# Altium PCB punto5pcb.PcbDoc
Units mm, origin at the board's own origin, x right, y up, seen from the top; angles counter-clockwise.
Board outline 50 x 50 mm, 2 copper layers (Top Layer, Bottom Layer); 23 components, 13 nets, 47 pads, 0 vias.
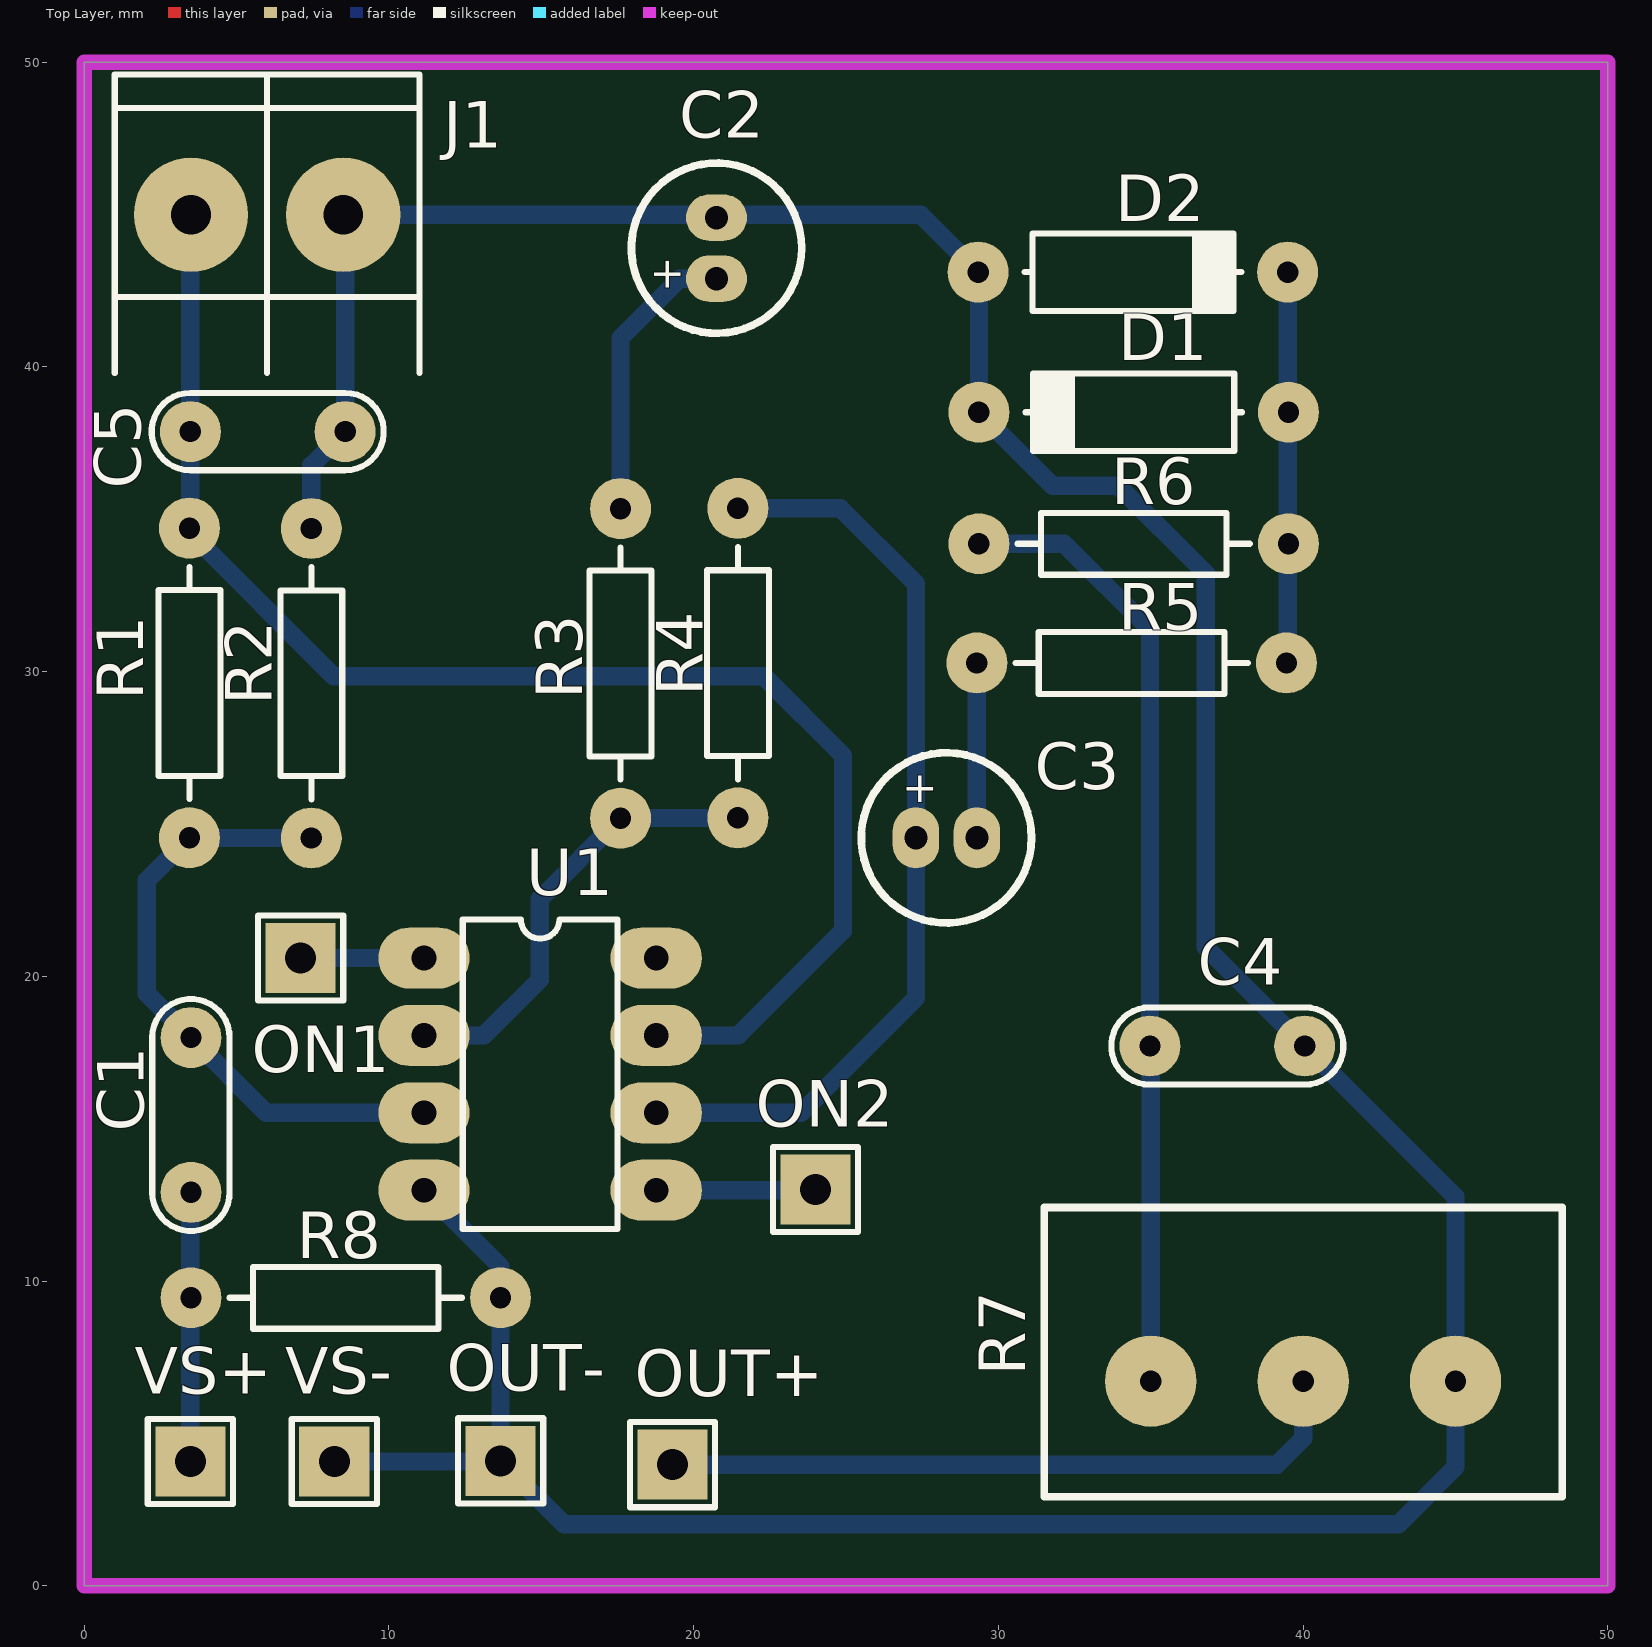
[diagram p0: Top Layer view]
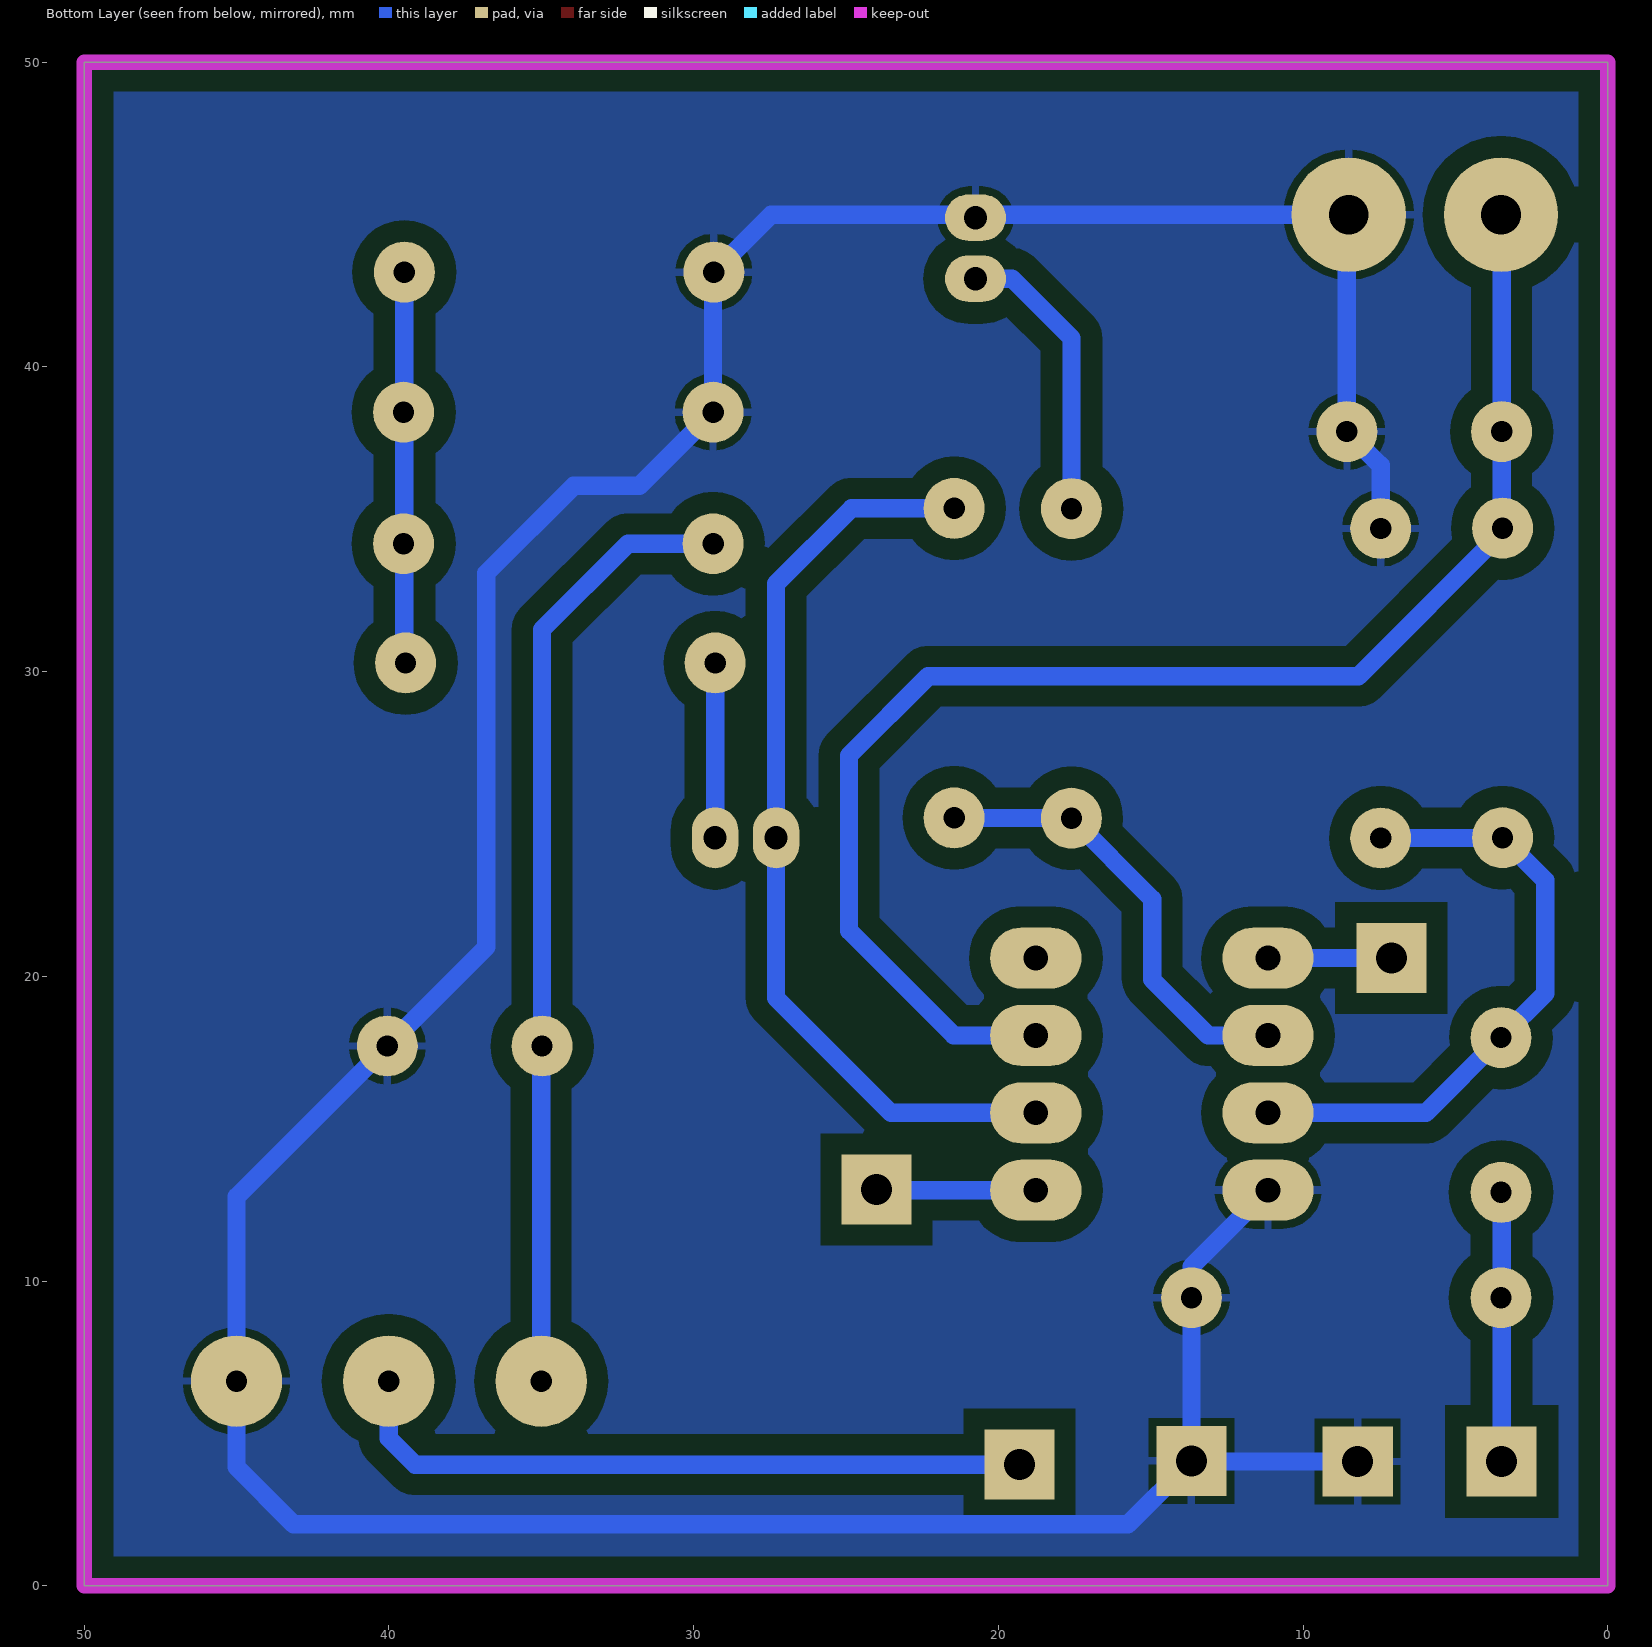
[diagram p1: Bottom Layer view, seen from below]
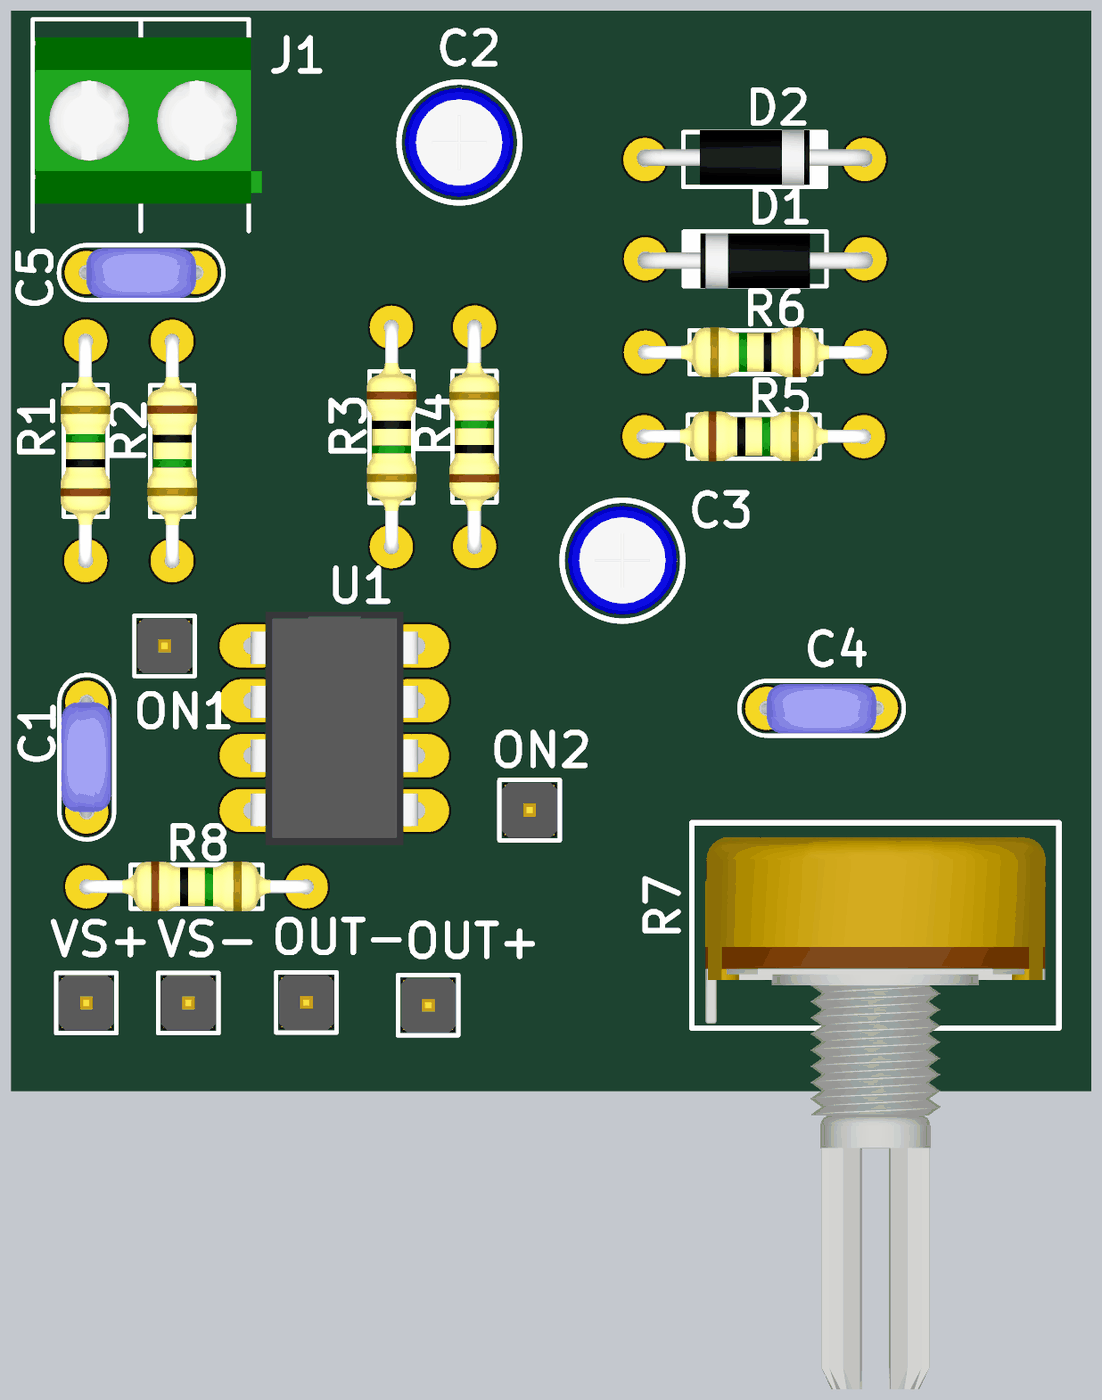
[diagram p2: 3D render of the assembled board from above, using the file's embedded part models]

## Layer stack, top to bottom
Top Solder: solder mask 0.0102, Solder Resist, Dk 3.5
Top Layer: signal copper 0.0356
Dielectric 1: dielectric 0.32, FR-4, Dk 4.8
Bottom Layer: signal copper 0.0356
Bottom Solder: solder mask 0.0102, Solder Resist, Dk 3.5

## Board outline
0,0 0,50 50,50 50,0 0,0

## Design rules (kind name [scope] priority, off if disabled: settings)
Clearance Polygon_Clearance [InPolygon] p1: gap=0.7
Clearance [All] p2: gap=0.3
PolygonConnect [All] p1: connectstyle=Relief reliefconductorwidth=0.254 reliefentries=4 polygonreliefangle="90 Angle" airgapwidth=0.254
RoutingVias [All] p1: holewidth=0.5 width=2 viastyle="Through Hole" minholewidth=0.5 minwidth=2 maxholewidth=0.5 maxwidth=2
SolderMaskExpansion [All] p1: expansion=0.102
Width [All] p1: maxlimit=0.6 minlimit=0.6 preferedwidth=0.6
30 further rules are at their usual default settings.

## Classes and differential pairs
component class punto5sq: C3 C4 C5 D1 D2 J1 ON1 ON2 OUT+ OUT- R1 R2 R3 R4 R5 R6 R8 VS+ VS-

## Components (designator, comment, footprint, x,y, rotation, side; value= is the part's Value field where it differs from the comment)
C1 "CAP" CAP200 3.5,15.45 r270 top
C2 "CAPPOL" CAP100RP 20.75,43.9 r90 top
C3 "33u" CAP100RP 28.296,24.546 r0 top
C4 "CAP" CAP200 37.516,17.713 r0 top
C5 "CAP" CAP200 6.02,37.881 r0 top
D1 "DIODO" DO41 34.442,38.516 r180 top
D2 "DIODO" DO41 34.417,43.113 r0 top
J1 "BORNERA 2" BORNERA2 6,45 r270 top
ON1 "TP" TPTH 7.1,20.6 r0 top
ON2 "TP" TPTH 24,13 r0 top
OUT+ "TP" TPTH 19.304,3.972 r90 top
OUT- "TP" TPTH 13.665,4.099 r90 top
R1 "RES" RES400 3.45,24.55 r90 top
R2 "RES" RES400 7.45,34.7 r270 top
R3 "RES" RES400 17.6,35.35 r270 top
R4 "RES" RES400 21.45,25.2 r90 top
R5 "1K" RES400 29.296,30.286 r0 top
R6 "RES" RES400 39.522,34.198 r180 top
R7 "POTENCIOMETRO" POTENCIOMETRO 40.005,6.715 r0 top
R8 "RES" RES400 3.5,9.45 r0 top
U1 "LM741" DIP8 11.15,20.6 r0 top
VS+ "TP" TPTH 3.48,4.073 r0 top
VS- "TP" TPTH 8.204,4.073 r0 top

## Footprints (in the part's own frame and the unit in brackets; to place one, negate y for a bottom-side part, rotate by r counter-clockwise, add the part's x,y. Pads: shape width x height; smd on the part's side, far side on the other; paste and mask are expansions set on the pad)
BORNERA2 [mm] "Bornera con Tornillos 5mm separación"
  round 3.75 hole 1.3: 1(0,2.5) 2(0,-2.5)
  silkscreen extent -4.6,-5 5.2,5, body extent -3.76,-4.89 3.94,5.61, height 10
CAP100RP [mm] "Body diameter 5mm"
  oval 1.524x2 hole 0.762: 1(-1,0) 2(1,0)
  silkscreen extent -2.79,-2.79 2.79,2.79, body extent -2.53,-2.51 2.53,2.54, height 11.53
CAP200 [mm]
  round 2 hole 0.7: 1(-2.54,0) 2(2.54,0)
  silkscreen extent -3.81,-1.27 3.81,1.27, body extent -2.79,-1.17 2.79,1.12, height 6.24
DIP8 [mm]
  oval 3x2 hole 0.813: 1(0,0) 2(0,-2.54) 3(0,-5.08) 4(0,-7.62) 5(7.62,-7.62) 6(7.62,-5.08) 7(7.62,-2.54) 8(7.62,0)
  silkscreen extent 1.27,-8.89 6.35,1.27, body extent -0.06,-9.21 7.7,1.59, height 4.5
DO41 [mm]
  round 2 hole 0.7: 1(-5.08,0) 2(5.08,0)
  silkscreen extent -3.56,-1.27 3.56,1.27, body extent -5.46,-1.19 5.46,1.37, height 2.03
POTENCIOMETRO [mm]
  round 3 hole 0.7: 1(-5,0) 2(0,0) 3(5,0)
  silkscreen extent -8.5,-3.8 8.5,5.7, body extent -7.87,-20.53 7.87,5.03, height 20.12
RES400 [mm]
  round 2 hole 0.7: 1(0,0) 2(10.16,0)
  silkscreen extent 1.27,-1.02 8.89,1.02, body extent -0.3,-1.14 10.46,1.17, height 2.43
TPTH [mm]
  rect 2.3x2.3 hole 1.016: 1(0,0)
  silkscreen extent -1.4,-1.4 1.4,1.4, body extent -1.27,-1.27 1.27,1.27, height 6.04

## Part data
C3: library part CAPPOL
R5: library part RES
U1: "LM741 Operational Amplifier"

## Nets (pads, with @x,y where several pads share a name; then routed paths per layer and width w, separated by ;. In a path a pad name is that pad's centre, name@x,y a point inside that pad or via, vN(x,y) a via of type N, cw(c..) or ccw(c..) an arc to the next point about the centre after c; other vN are vias at no path point)
GND: C2.2 C4.2 C5.2 D1.2 D2.1 J1.1 OUT-.1 R2.1 R7.3 R8.2 U1.4 VS-.1 | length 127.7
  Bottom Layer w0.6: R2.1 7.45,36.771 C5.2 8.56,44.94 J1.1 27.45,45 D2.1 29.362,43.088 D1.2 31.775,36.103 33.934,36.103 36.805,33.233 36.805,20.964 C4.2 45.005,12.764 R7.3 45.005,3.892 43.129,2.016 15.748,2.016 OUT-.1 13.66,4.104 R8.2 13.66,10.47 U1.4 ; VS-.1 OUT-.1@13.64,4.073
NetC1_2: C1.2 R8.1 VS+.1 | length 8.8
  Bottom Layer w0.6: VS+.1 3.48,12.89 C1.2
NetC2_1: C2.1 R3.1 | length 9.6
  Bottom Layer w0.6: R3.1 17.6,40.95 19.55,42.9 C2.1
NetC3_1: C3.1 R4.2 U1.6 | length 30.6
  Bottom Layer w0.6: U1.6 23.52,15.52 27.296,19.296 C3.1 27.296,32.886 24.822,35.36 R4.2
NetC3_2: C3.2 R5.1 | length 5.7
  Bottom Layer w0.6: C3.2 R5.1
NetC4_1: C4.1 R6.2 R7.1 | length 31.5
  Bottom Layer w0.6: R6.2 32.156,34.198 34.976,31.378 C4.1 35.005,17.684 R7.1
NetD1_1: D1.1 D2.2 R5.2 R6.1 | length 12.8
  Bottom Layer w0.6: R5.2 39.497,30.328 D2.2
NetON1_1: ON1.1 U1.1 | length 4
  Bottom Layer w0.6: ON1.1 U1.1
NetON2_1: ON2.1 U1.5 | length 5.2
  Bottom Layer w0.6: U1.5 23.98,12.98 ON2.1
NetOUT+_1: OUT+.1 R7.2 | length 23
  Bottom Layer w0.6: OUT+.1@19.332,4 OUT+.1 39.141,3.972 40.005,4.835 R7.2
V+: C1.1 R1.1 R2.2 U1.3 | length 20.4
  Bottom Layer w0.6: R2.2 3.46,24.54 R1.1 2.05,23.15 2.05,19.44 C1.1 5.97,15.52 U1.3
V-: R3.2 R4.1 U1.2 | length 14.8
  Bottom Layer w0.6: U1.2 13.11,18.06 14.95,19.9 14.95,22.54 R3.2 17.61,25.2 R4.1
VCC: C5.1 J1.2 R1.2 U1.7 | length 48.2
  Bottom Layer w0.6: J1.2 3.48,44.98 C5.1 3.48,34.553 8.183,29.85 22.3,29.85 24.9,27.25 24.9,21.5 21.46,18.06 U1.7
pads on no net: U1.8

## Polygon pours and split planes (outlines as drawn)
GND on Bottom Layer "Bottom Layer-No Net" (solid, remove dead copper, pour order 2): 0,0 0,50 50,50 50,0 0,0

## Keep-outs
Keep-Out Layer:
  the board outline again, w0.5

## Text inside footprints (layer, text, board x,y; h text height)
C2: Top Overlay "+" at 19.582,42.452 h1.02 r90
C3: Top Overlay "+" at 26.848,25.714 h1.02